# EAGLE board antenna (EAGLE 9.6.1)
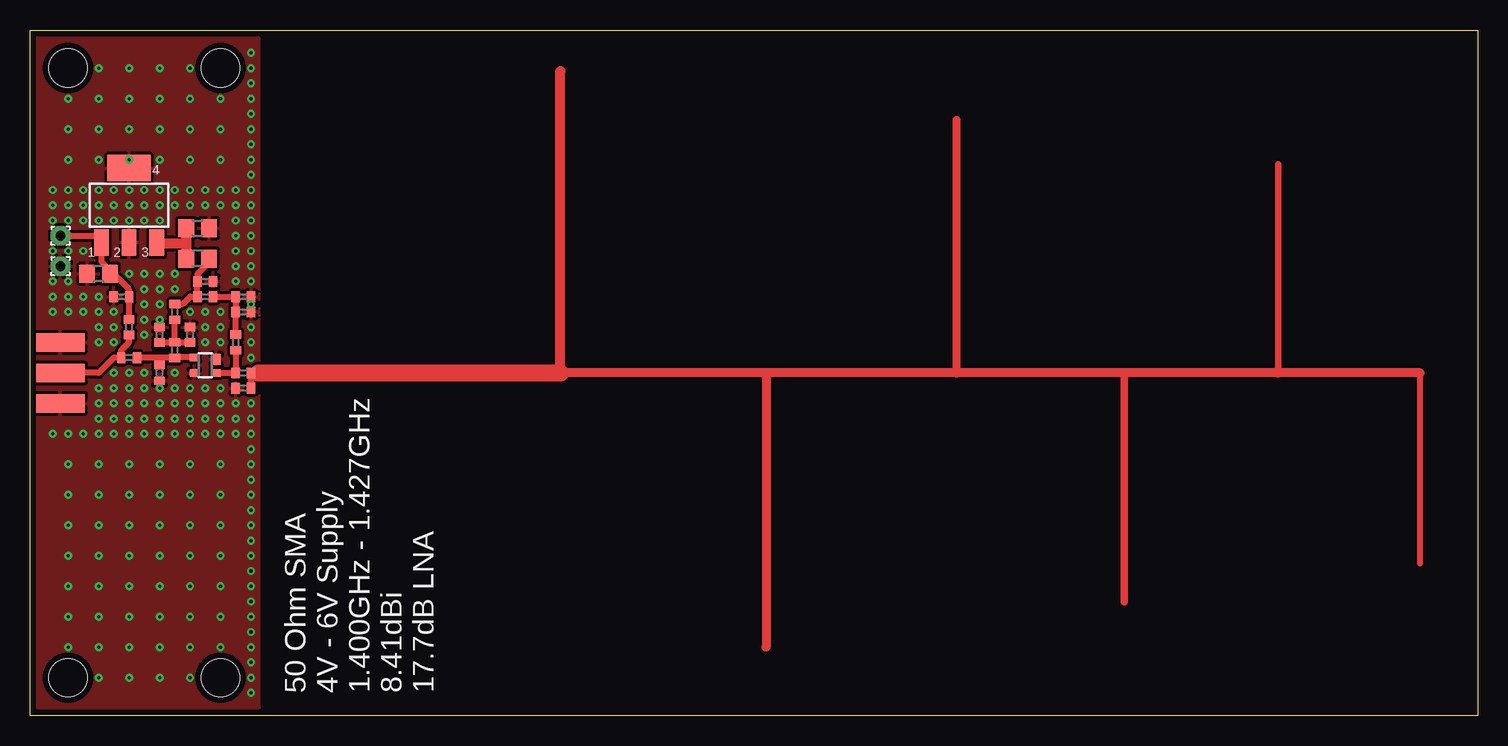
[diagram p0: board, top side]
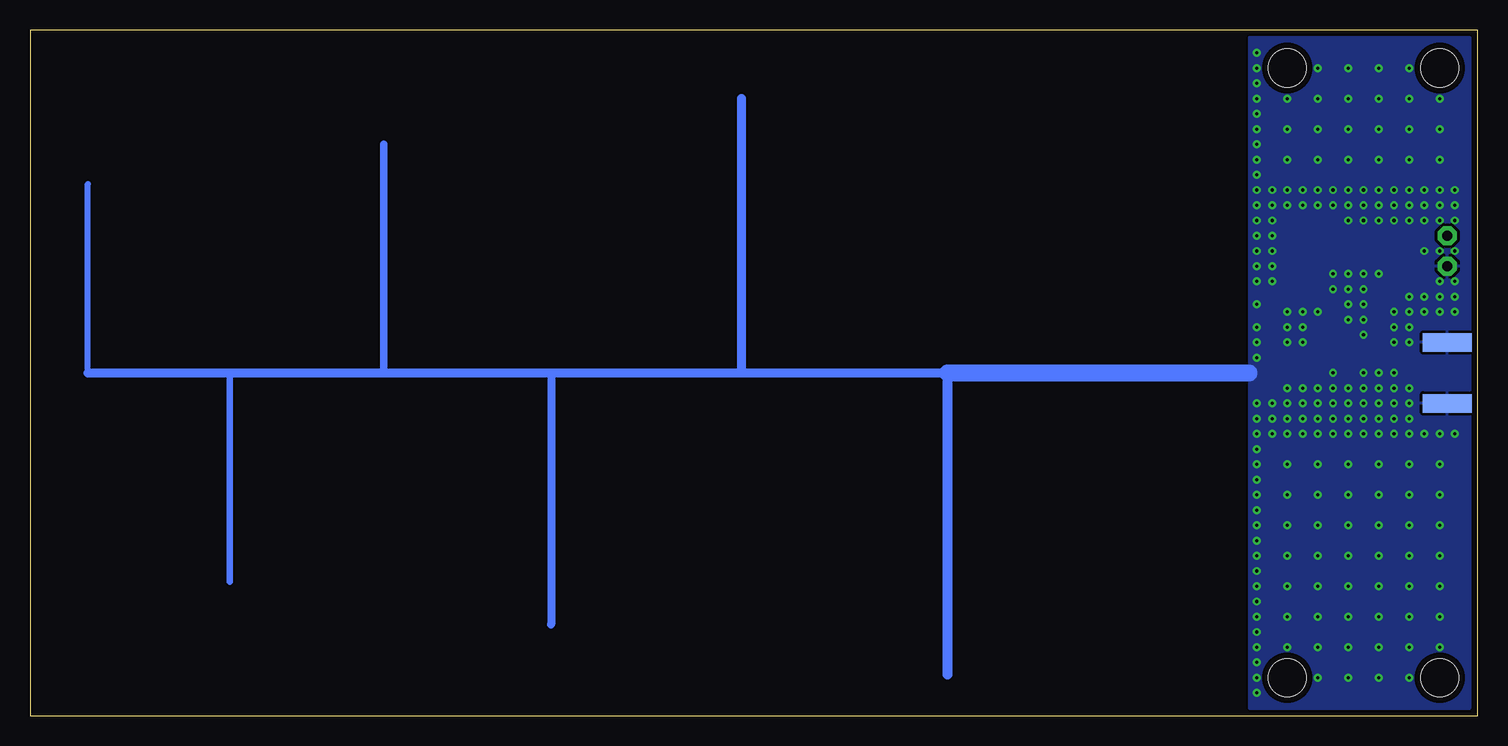
[diagram p1: board, bottom side, seen from below]

Size 120.65 x 57.15 mm. Coordinates in mm from the lower left corner, seen from the top.
Outline: 0,0 0,57.15 120.65,57.15 120.65,0 0,0
Copper layers (1*16): Top 0.035mm / dielectric 0.5mm / Bottom 0.035mm
Design rules "33each": minimum track width 5mil, minimum drill 10mil, track to track 5mil, track to pad 5mil, pad to pad 5mil, via to via 5mil, smd to smd 5mil, copper to edge 20mil, drill to drill 8mil, minimum pad ring 10mil, minimum via ring 8mil, stop-mask expansion 4mil, vias tented up to drill 0mil, thermal gap 10mil
Holes 3.17 mm at 3.17,53.98 3.17,3.17 15.88,53.98 15.88,3.17

## Footprints (pad centres in the part's own frame; a part is rotated, then mirrored left to right if it is on the bottom)
R0805 = smd 1.3 x 1.5: 1 -0.95,0; 2 0.95,0
R0402 = smd 0.7 x 0.9: 1 -0.65,0; 2 0.65,0
1,6/0,8 = drill 0.813 pad 1.6 octagon: 1 0,0
SMA-EDGE = smd 1.524 x 4.064: GND@0 0,0; GND@1 5.08,0; SIG 2.54,0 | smd 1.524 x 4.064 bottom: GND@2 0,0; GND@3 5.08,0
SOT343R = smd 0.9 x 0.8: 1 0.5,-0.9 | smd 0.6 x 0.8: 2 -0.65,-0.9; 3 -0.65,0.9; 4 0.65,0.9
SOT223 = smd 1.219 x 2.235: 1 -2.311,-3.099; 2 0,-3.099; 3 2.311,-3.099 | smd 3.6 x 2.2: 4 0,3.099

## Placement (x,y rotation side)
C1  1u  [R0805]  5.71,36.83 180 top
C2  1u  [R0805]  13.97,40.64 0 top
C3  100p  [R0402]  8.26,29.84 180 top
C4  10n  [R0402]  7.62,34.92 180 top
C5  12p  [R0402]  10.79,28.57 270 top
C6  1n  [R0402]  17.78,33.66 0 top
C7  10n  [R0402]  17.78,34.92 0 top
C8  10n  [R0402]  13.34,31.75 90 top
C9  1n  [R0402]  10.79,31.75 90 top
C10  100p  [R0402]  17.78,28.57 180 top
C11  10n  [R0402]  14.61,36.2 0 top
E$1  [1,6/0,8]  2.54,37.47 0 top
E$2  [1,6/0,8]  2.54,40.01 0 top
E$11  [SMA-EDGE]  2.54,26.04 90 top
L1  22n  [R0402]  8.26,32.38 270 top
L2  22n  [R0402]  17.14,31.11 90 top
L3  1.1n  [R0402]  12.06,30.48 90 top
L4  22n  [R0402]  12.06,33.66 270 top
Q1  BUF730F  [SOT343R]  14.61,29.21 90 top
R1  220  [R0805]  13.97,38.1 180 top
R2  51k  [R0402]  14.61,34.92 180 top
R3  91  [R0402]  17.78,27.3 180 top
U1  [SOT223]  8.26,42.55 0 top

## Library data of the parts
C1 C2 R1 = rcl
C3-C11 L1-L4 R2 R3 = ref-packages-longpad
E$1 E$2 = wirepad
E$11 = SparkFun-Retired
Q1 = transistor-small-signal
U1 = transistor

## Nets
AMP: C3.1 C5.1 L3.1 Q1.4
ANT: C10.1 R3.1
BIAS: C11.1 L4.1 R1.1 R2.2
GND: C1.2 C2.2 C4.2 C5.2 C6.2 C7.2 C8.2 C9.2 C11.2 E$1.1 E$11.GND@0 E$11.GND@1 E$11.GND@2 E$11.GND@3 Q1.1 Q1.3 R3.2 U1.2 U1.4
IN: C10.2 L2.1 Q1.2
OUT: C3.2 E$11.SIG L1.2
V3.3: C2.1 R1.2 U1.3
V5: C1.1 C4.1 E$2.1 L1.1 U1.1
VBB: C6.1 C7.1 L2.2 R2.1
VCC: C8.1 C9.1 L3.2 L4.2

## Tracks (layer width: path | path; a pad name or v marks a point on that pad's centre or on a via)
AMP
  Top 0.508: Q1.4 12.1,29.86 L3.1 10.79,29.83 | 10.79,29.83 C3.1 | C5.1 10.79,29.83
ANT
  Top 0.508: 115.82,28.57 115.82,12.7 | 19.05,28.57 C10.1 R3.1
  Top 0.559: 104.01,28.57 104.01,45.97
  Top 0.61: 91.19,28.57 91.19,9.53
  Top 0.66: 77.22,28.57 77.22,49.66
  Top 0.762: 115.82,28.57 104.01,28.57 91.19,28.57 77.22,28.57 61.34,28.57 | 61.34,28.57 44.2,28.57 | 61.34,28.57 61.34,5.71
  Top 0.813: 44.2,28.57 44.2,53.72
  Top 1.422: 19.05,28.57 44.2,28.57
BIAS
  Top 0.508: L4.1 12.71,34.3 13.34,34.92 R2.2 C11.1 13.97,36.83 14.92,37.78 R1.1
GND  (via drill 0.25)
  Bottom 0.508: 115.82,28.57 115.82,44.32
  Bottom 0.559: 104.01,28.57 104.01,11.18
  Bottom 0.61: 91.19,28.57 91.19,47.62
  Bottom 0.66: 77.22,28.57 77.22,7.62
  Bottom 0.762: 115.82,28.57 104.01,28.57 91.19,28.57 77.22,28.57 61.34,28.57 | 61.34,28.57 44.2,28.57 | 61.34,28.57 61.34,51.44
  Bottom 0.813: 44.2,28.57 44.2,3.43
  Bottom 1.422: 44.2,28.57 19.05,28.57
  other vias: 18.41,45.09 18.41,46.35 18.41,47.62 18.41,48.9 18.41,50.16 18.41,51.44 18.41,22.23 18.41,20.95 18.41,19.68 18.41,18.41 18.41,17.14 18.41,15.88 18.41,14.61 18.41,13.34 18.41,12.06 18.41,10.79 18.41,9.53 18.41,8.26 18.41,6.99 18.41,5.71 18.41,31.11 18.41,26.04 14.61,31.11 15.88,31.11 12.06,28.57 13.34,27.3 14.61,27.3 15.88,27.3 12.06,27.3 6.99,27.3 15.88,43.81 18.41,41.27 18.41,43.81 17.14,23.5 17.14,26.04 8.26,27.3 8.26,28.57 9.53,33.02 9.53,34.29 9.53,35.56 9.53,28.57 3.17,43.81 3.17,41.27 5.71,43.81 8.26,43.81 10.79,43.81 14.61,23.5 12.06,23.5 10.79,23.5 18.41,29.84 8.26,23.5 5.71,23.5 3.17,23.5 8.26,26.04 10.79,26.04 12.06,26.04 14.61,26.04 6.99,28.57 10.79,33.02 10.79,34.29 10.79,35.56 10.79,36.83 13.34,33.66 15.88,32.38 15.88,33.66 18.41,36.2 18.41,32.38 18.41,38.73 4.45,23.5 6.99,23.5 6.99,24.77 6.99,26.04 9.53,27.3 9.53,26.04 13.34,26.04 15.88,26.04 8.26,24.77 10.79,27.3 9.53,31.75 14.61,33.66 14.61,32.38 12.06,35.56 12.06,36.83 13.34,43.81 5.71,41.27 8.26,41.27 10.79,41.27 9.53,36.83 18.41,37.47 17.14,36.2 17.14,38.73 17.14,40.01 17.14,41.27 17.14,42.55 18.41,42.55 15.88,42.55 14.61,42.55 13.34,42.55 12.06,42.55 10.79,42.55 12.06,43.81 14.61,43.81 17.14,43.81 18.41,40.01 9.53,23.5 13.34,23.5 15.88,23.5 18.41,23.5 18.41,24.77 17.14,24.77 15.88,24.77 14.61,24.77 13.34,24.77 12.06,24.77 10.79,24.77 9.53,24.77 3.17,38.73 4.45,41.27 4.45,38.73 3.17,36.2 3.17,34.92 3.17,33.66 4.45,33.66 5.71,33.66 6.99,33.66 6.99,32.38 6.99,31.11 4.45,34.92 5.71,34.92 6.99,41.27 9.53,41.27 3.17,42.55 4.45,43.81 4.45,42.55 5.71,42.55 6.99,42.55 8.26,42.55 6.99,43.81 9.53,43.81 9.53,42.55 18.41,52.7 18.41,53.98 18.41,55.24 18.41,4.45 18.41,3.17 18.41,1.91 5.71,32.38 5.71,31.11 5.71,27.3 5.71,26.04 5.71,24.77 1.91,23.5 1.91,43.81 1.91,42.55 1.91,41.27 1.91,38.73 1.91,36.2 1.91,34.92 1.91,33.66 8.26,36.83 18.41,34.29 17.14,37.47 15.88,46.35 15.88,48.9 15.88,51.44 13.34,51.44 13.34,48.9 13.34,46.35 13.34,53.98 10.79,46.35 10.79,48.9 10.79,51.44 10.79,53.98 8.26,46.35 5.71,46.35 3.17,46.35 3.17,48.9 5.71,48.9 8.26,48.9 8.26,51.44 8.26,53.98 5.71,53.98 5.71,51.44 3.17,51.44 15.88,20.95 15.88,18.41 15.88,15.88 15.88,13.34 15.88,10.79 15.88,8.26 15.88,5.71 13.34,5.71 13.34,8.26 13.34,3.17 10.79,3.17 8.26,3.17 5.71,3.17 13.34,20.95 10.79,20.95 8.26,20.95 5.71,20.95 3.17,20.95 3.17,18.41 3.17,15.88 3.17,13.34 3.17,10.79 3.17,8.26 3.17,5.71 5.71,5.71 5.71,8.26 5.71,10.79 5.71,13.34 5.71,15.88 5.71,18.41 13.34,18.41 10.79,18.41 8.26,18.41 8.26,15.88 10.79,15.88 13.34,15.88 13.34,13.34 13.34,10.79 10.79,10.79 10.79,13.34 8.26,13.34 8.26,10.79 8.26,8.26 8.26,5.71 10.79,5.71 10.79,8.26
  pour Top (isolate 0.254): 0.64,56.52 19.05,56.52 19.05,0.64 0.64,0.64
  pour Bottom (isolate 0.254): 0.64,56.52 19.05,56.52 19.05,0.64 0.64,0.64
IN
  Top 0.508: Q1.2 15.52,28.57 C10.2 17.14,28.59 L2.1
OUT
  Top 0.508: E$11.SIG 5.71,28.57 6.99,29.84 C3.2 7.61,30.46 8.26,31.11 L1.2
V3.3
  Top 0.813: C2.1 13.02,39.37 | 13.02,39.37 R1.2 | U1.3 10.64,39.37 13.02,39.37
V5
  Top 0.508: L1.1 8.26,34.91 C4.1 8.27,35.55 6.99,36.83 C1.1 6.67,37.15 5.94,37.87 U1.1 5.38,40.01 E$2.1
VBB
  Top 0.508: L2.2 17.14,33.64 C6.1 C7.1 R2.1
VCC
  Top 0.508: C9.1 10.82,31.13 L3.2 | L3.2 13.3,31.13 C8.1 | L3.2 L4.2

## Text on the board
tNames: 50 Ohm SMA / 4V - 6V Supply / 1.400GHz - 1.427GHz / 8.41dBi / 17.7dB LNA